# EAGLE board 13791-Qwiic Shield for RaspberryPi-panel.v10 (EAGLE 7.5.0), part 1 of 2
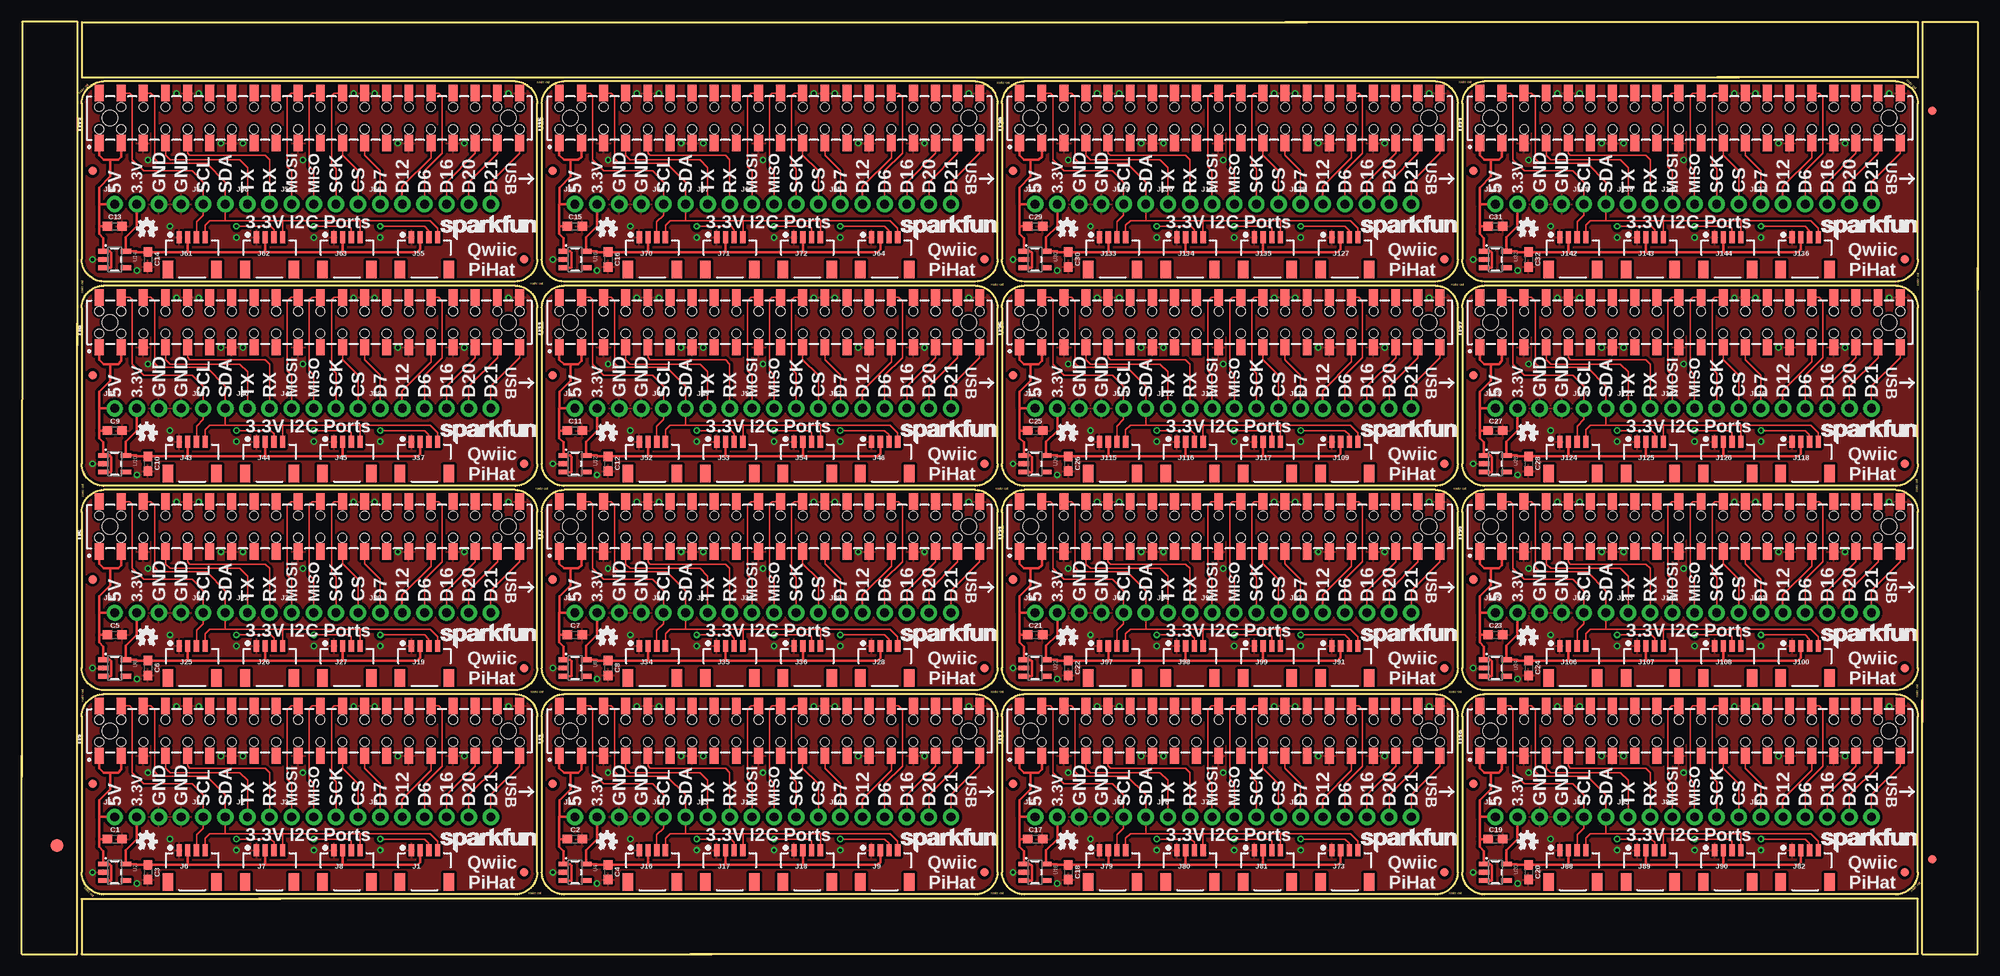
[diagram p0: board, top side]
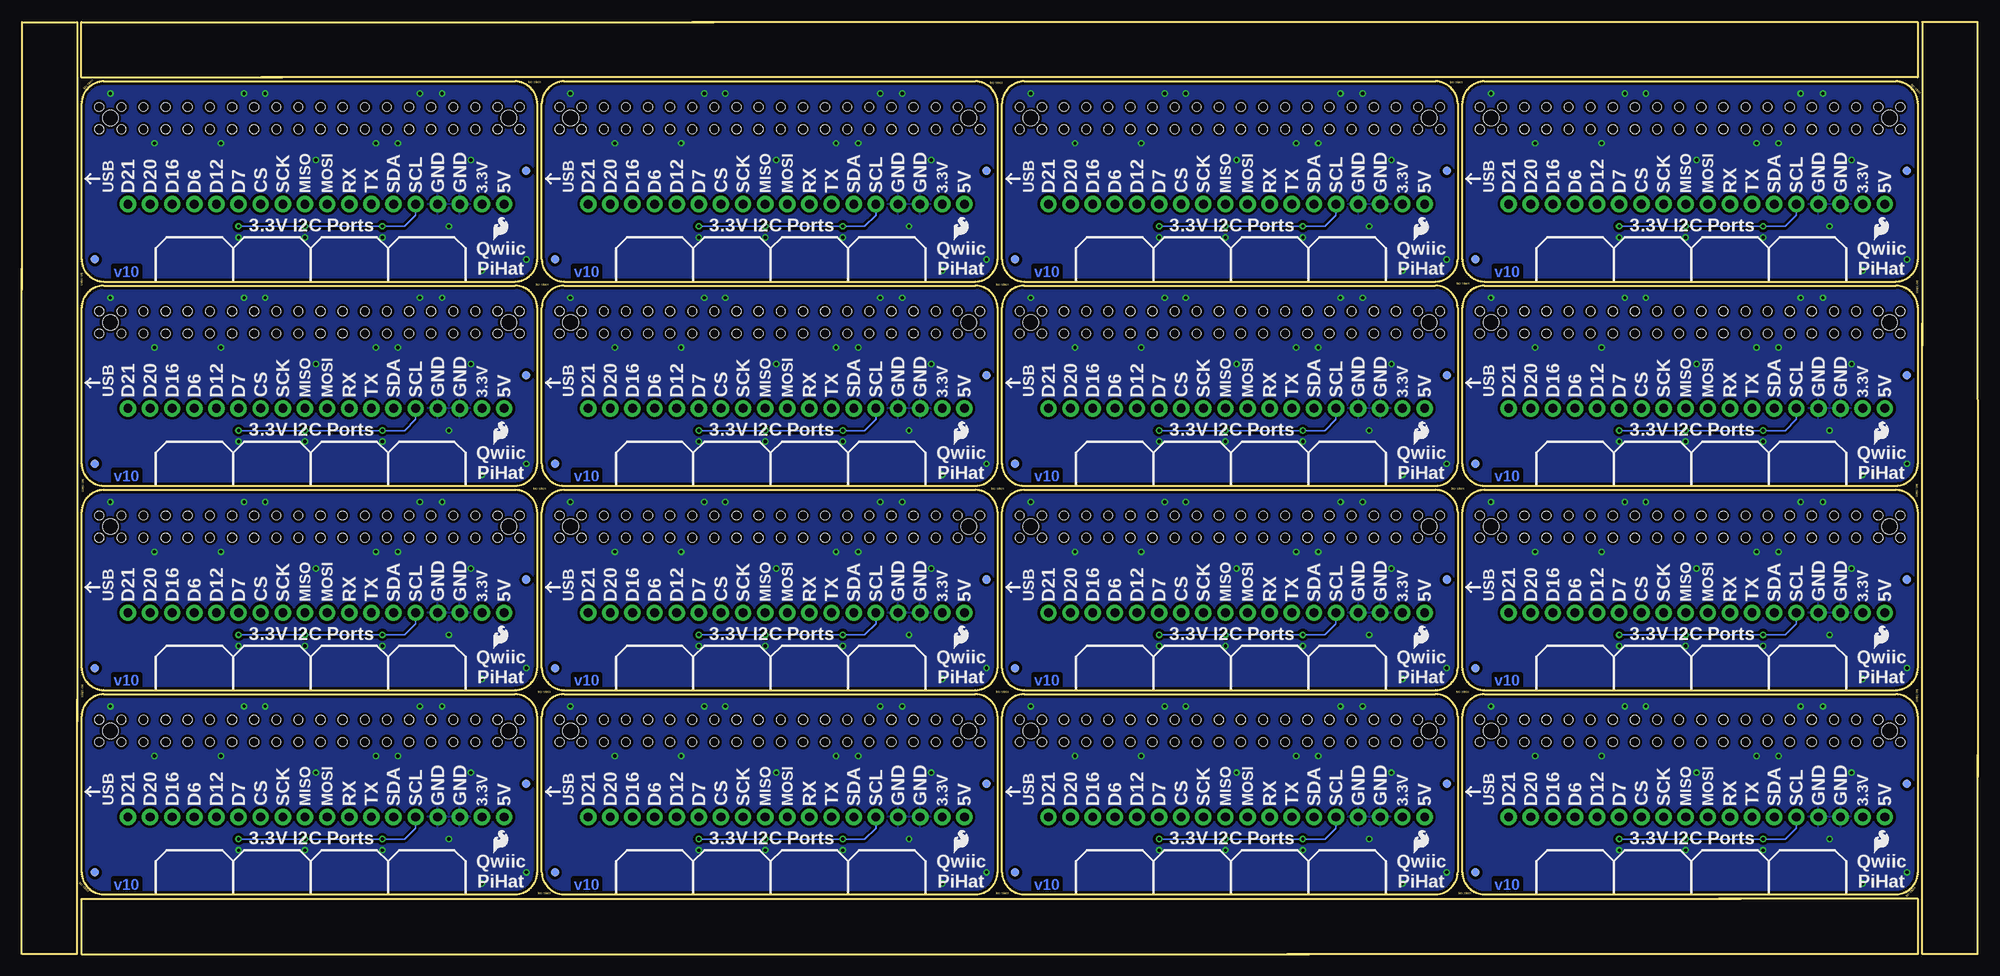
[diagram p1: board, bottom side, seen from below]

Size 224.54 x 107.01 mm. Coordinates in mm from the lower left corner, seen from the top.
Outline: 79.25,0 6.86,0 6.86,6.35 29.72,6.35
Outline: 27.18,6.35 217.68,6.35 217.68,0 76.71,0
Outline: 6.35,72.39 6.35,0 0,0 0,22.86
Outline: 0,20.32 0.03,107.01 6.38,107.01 6.35,69.85
Outline: 145.06,106.98 217.7,106.98 217.7,100.64 194.59,100.64
Outline: 197.13,100.64 6.88,100.64 6.88,106.98 147.6,106.98
Outline: 218.19,26.67 218.19,106.98 224.54,106.98 224.54,76.2
Outline: 224.54,78.74 224.54,0 218.19,0 218.19,29.21
Outline: 6.86,27.3 6.86,9.4 arc87 9.4,6.86 56.64,6.86 arc87 59.18,9.4 59.18,27.3 arc87 56.64,29.84 9.4,29.84 arc87 6.86,27.3
Outline: 59.69,27.3 59.69,9.4 arc87 62.23,6.86 109.47,6.86 arc87 112.01,9.4 112.01,27.3 arc87 109.47,29.84 62.23,29.84 arc87 59.69,27.3
Outline: 6.86,50.75 6.86,32.84 arc87 9.4,30.3 56.64,30.3 arc87 59.18,32.84 59.18,50.75 arc87 56.64,53.29 9.4,53.29 arc87 6.86,50.75
Outline: 59.69,50.75 59.69,32.84 arc87 62.23,30.3 109.47,30.3 arc87 112.01,32.84 112.01,50.75 arc87 109.47,53.29 62.23,53.29 arc87 59.69,50.75
Outline: 6.86,74.19 6.86,56.29 arc87 9.4,53.75 56.64,53.75 arc87 59.18,56.29 59.18,74.19 arc87 56.64,76.73 9.4,76.73 arc87 6.86,74.19
Outline: 59.69,74.19 59.69,56.29 arc87 62.23,53.75 109.47,53.75 arc87 112.01,56.29 112.01,74.19 arc87 109.47,76.73 62.23,76.73 arc87 59.69,74.19
Outline: 6.86,97.64 6.86,79.73 arc87 9.4,77.19 56.64,77.19 arc87 59.18,79.73 59.18,97.64 arc87 56.64,100.18 9.4,100.18 arc87 6.86,97.64
Outline: 59.69,97.64 59.69,79.73 arc87 62.23,77.19 109.47,77.19 arc87 112.01,79.73 112.01,97.64 arc87 109.47,100.18 62.23,100.18 arc87 59.69,97.64
Outline: 112.52,27.3 112.52,9.4 arc87 115.06,6.86 162.31,6.86 arc87 164.85,9.4 164.85,27.3 arc87 162.31,29.84 115.06,29.84 arc87 112.52,27.3
Outline: 165.35,27.3 165.35,9.4 arc87 167.89,6.86 215.14,6.86 arc87 217.68,9.4 217.68,27.3 arc87 215.14,29.84 167.89,29.84 arc87 165.35,27.3
Outline: 112.52,50.75 112.52,32.84 arc87 115.06,30.3 162.31,30.3 arc87 164.85,32.84 164.85,50.75 arc87 162.31,53.29 115.06,53.29 arc87 112.52,50.75
Outline: 165.35,50.75 165.35,32.84 arc87 167.89,30.3 215.14,30.3 arc87 217.68,32.84 217.68,50.75 arc87 215.14,53.29 167.89,53.29 arc87 165.35,50.75
Outline: 112.52,74.19 112.52,56.29 arc87 115.06,53.75 162.31,53.75 arc87 164.85,56.29 164.85,74.19 arc87 162.31,76.73 115.06,76.73 arc87 112.52,74.19
Outline: 165.35,74.19 165.35,56.29 arc87 167.89,53.75 215.14,53.75 arc87 217.68,56.29 217.68,74.19 arc87 215.14,76.73 167.89,76.73 arc87 165.35,74.19
Outline: 112.52,97.64 112.52,79.73 arc87 115.06,77.19 162.31,77.19 arc87 164.85,79.73 164.85,97.64 arc87 162.31,100.18 115.06,100.18 arc87 112.52,97.64
Outline: 165.35,97.64 165.35,79.73 arc87 167.89,77.19 215.14,77.19 arc87 217.68,79.73 217.68,97.64 arc87 215.14,100.18 167.89,100.18 arc87 165.35,97.64
Copper layers (1*16): Top 0.035mm / dielectric 1.5mm / Bottom 0.035mm
Design rules "SparkFun-2-layer-TIGHT *": minimum track width 7mil, minimum drill 15mil, track to track 6mil, track to pad 6mil, pad to pad 6mil, via to via 6mil, smd to smd 6mil, copper to edge 7mil, drill to drill 7mil, minimum pad ring 7mil, minimum via ring 7mil, stop-mask expansion 4mil, vias tented up to drill 25mil, thermal gap 10mil
Net classes: 0 Default: width 0.178 mm; 1 vcc: width 0.178 mm

## Footprints (pad centres in the part's own frame; a part is rotated, then mirrored left to right if it is on the bottom)
0603 = smd 1.1 x 1: 1 -0.85,0; 2 0.85,0
FIDUCIAL-1.5X3 = smd 1.5 x 1.5: 1 0,0
FIDUCIAL-1X2 = smd 1 x 1: 1 0,0
1X04_1MM_RA = smd 0.6 x 1.35: 1 -1.5,0; 2 -0.5,0; 3 0.5,0; 4 1.5,0 | smd 1.2 x 2: NC1 2.8,-3.675; NC2 -2.8,-3.675
1X02_NO_SILK = drill 1.016 pad 1.88: 1 0,0; 2 2.54,0
1X04_NO_SILK = drill 1.016 pad 1.88: 1 0,0; 2 2.54,0; 3 5.08,0; 4 7.62,0
1X06_NO_SILK = drill 1.016 pad 1.88: 1 0,0; 2 2.54,0; 3 5.08,0; 4 7.62,0; 5 10.16,0; 6 12.7,0
RASPBERRY_PI_SHIELD_BOTTOM_ENTRY_NOHOLES = smd 1.02 x 1.87: 1 8.37,7.665; 2 8.37,1.935; 3 10.91,7.665; 4 10.91,1.935; 5 13.45,7.665; 6 13.45,1.935; 7 15.99,7.665; 8 15.99,1.935; 9 18.53,7.665; 10 18.53,1.935; 11 21.07,7.665; 12 21.07,1.935; 13 23.61,7.665; 14 23.61,1.935; 15 26.15,7.665; 16 26.15,1.935; 17 28.69,7.665; 18 28.69,1.935; 19 31.23,7.665; 20 31.23,1.935; 21 33.77,7.665; 22 33.77,1.935; 23 36.31,7.665; 24 36.31,1.935; 25 38.85,7.665; 26 38.85,1.935; 27 41.39,7.665; 28 41.39,1.935; 29 43.93,7.665; 30 43.93,1.935; 31 46.47,7.665; 32 46.47,1.935; 33 49.01,7.665; 34 49.01,1.935; 35 51.55,7.665; 36 51.55,1.935; 37 54.09,7.665; 38 54.09,1.935; 39 56.63,7.665; 40 56.63,1.935 | hole 1.02: 31.23,6.07; 31.23,3.53; 28.69,3.53; 28.69,6.07; 26.15,6.07; 26.15,3.53; 23.61,3.53; 23.61,6.07; 36.31,6.07; 36.31,3.53; 33.77,3.53; 33.77,6.07; 15.99,6.07; 15.99,3.53; 13.45,3.53; 13.45,6.07; 10.91,6.07; 10.91,3.53; 8.37,3.53; 8.37,6.07; 21.07,6.07; 21.07,3.53; 18.53,3.53; 18.53,6.07; 46.47,6.07; 46.47,3.53; 43.93,3.53; 43.93,6.07; 41.39,6.07; 41.39,3.53; 38.85,3.53; 38.85,6.07; 51.55,6.07; 51.55,3.53; 49.01,3.53; 49.01,6.07; 54.09,6.07; 56.63,6.07; 56.63,3.53; 54.09,3.53 | hole 1.8: 55.36,4.8; 9.64,4.8
SOT23-5 = smd 0.55 x 1.2: 1 -0.95,-1.3; 2 0,-1.3; 3 0.95,-1.3; 4 0.95,1.3; 5 -0.95,1.3

## Placement (x,y rotation side)
C1  1.0uF  [0603]  10.67,13.21 0 top
C2  1.0uF  [0603]  63.5,13.21 0 top
C3  1.0uF  [0603]  14.48,9.4 270 top
C4  1.0uF  [0603]  67.31,9.4 270 top
C5  1.0uF  [0603]  10.67,36.65 0 top
C6  1.0uF  [0603]  14.48,32.84 270 top
C7  1.0uF  [0603]  63.5,36.65 0 top
C8  1.0uF  [0603]  67.31,32.84 270 top
C9  1.0uF  [0603]  10.67,60.1 0 top
C10  1.0uF  [0603]  14.48,56.29 270 top
C11  1.0uF  [0603]  63.5,60.1 0 top
C12  1.0uF  [0603]  67.31,56.29 270 top
C13  1.0uF  [0603]  10.67,83.54 0 top
C14  1.0uF  [0603]  14.48,79.73 270 top
C15  1.0uF  [0603]  63.5,83.54 0 top
C16  1.0uF  [0603]  67.31,79.73 270 top
C17  1.0uF  [0603]  116.33,13.21 0 top
C18  1.0uF  [0603]  120.14,9.4 270 top
C19  1.0uF  [0603]  169.16,13.21 0 top
C20  1.0uF  [0603]  172.97,9.4 270 top
C21  1.0uF  [0603]  116.33,36.65 0 top
C22  1.0uF  [0603]  120.14,32.84 270 top
C23  1.0uF  [0603]  169.16,36.65 0 top
C24  1.0uF  [0603]  172.97,32.84 270 top
C25  1.0uF  [0603]  116.33,60.1 0 top
C26  1.0uF  [0603]  120.14,56.29 270 top
C27  1.0uF  [0603]  169.16,60.1 0 top
C28  1.0uF  [0603]  172.97,56.29 270 top
C29  1.0uF  [0603]  116.33,83.54 0 top
C30  1.0uF  [0603]  120.14,79.73 270 top
C31  1.0uF  [0603]  169.16,83.54 0 top
C32  1.0uF  [0603]  172.97,79.73 270 top
E$1  [FIDUCIAL-1.5X3]  4.06,12.45 0 top
E$7  [FIDUCIAL-1X2]  219.33,96.77 180 top
E$8  [FIDUCIAL-1X2]  219.33,10.92 0 top
FD1  FIDUCIAL1X2  [FIDUCIAL-1X2]  8.13,19.56 180 top
FD2  FIDUCIAL1X2  [FIDUCIAL-1X2]  57.66,9.4 180 top
FD3  FIDUCIAL1X2  [FIDUCIAL-1X2]  57.66,9.4 0 bottom
FD4  FIDUCIAL1X2  [FIDUCIAL-1X2]  8.13,19.56 0 bottom
FD5  FIDUCIAL1X2  [FIDUCIAL-1X2]  60.96,19.56 180 top
FD6  FIDUCIAL1X2  [FIDUCIAL-1X2]  110.49,9.4 180 top
FD7  FIDUCIAL1X2  [FIDUCIAL-1X2]  110.49,9.4 0 bottom
FD8  FIDUCIAL1X2  [FIDUCIAL-1X2]  60.96,19.56 0 bottom
FD9  FIDUCIAL1X2  [FIDUCIAL-1X2]  8.13,43 180 top
FD10  FIDUCIAL1X2  [FIDUCIAL-1X2]  57.66,32.84 180 top
FD11  FIDUCIAL1X2  [FIDUCIAL-1X2]  57.66,32.84 0 bottom
FD12  FIDUCIAL1X2  [FIDUCIAL-1X2]  8.13,43 0 bottom
FD13  FIDUCIAL1X2  [FIDUCIAL-1X2]  60.96,43 180 top
FD14  FIDUCIAL1X2  [FIDUCIAL-1X2]  110.49,32.84 180 top
FD15  FIDUCIAL1X2  [FIDUCIAL-1X2]  110.49,32.84 0 bottom
FD16  FIDUCIAL1X2  [FIDUCIAL-1X2]  60.96,43 0 bottom
FD17  FIDUCIAL1X2  [FIDUCIAL-1X2]  8.13,66.45 180 top
FD18  FIDUCIAL1X2  [FIDUCIAL-1X2]  57.66,56.29 180 top
FD19  FIDUCIAL1X2  [FIDUCIAL-1X2]  57.66,56.29 0 bottom
FD20  FIDUCIAL1X2  [FIDUCIAL-1X2]  8.13,66.45 0 bottom
FD21  FIDUCIAL1X2  [FIDUCIAL-1X2]  60.96,66.45 180 top
FD22  FIDUCIAL1X2  [FIDUCIAL-1X2]  110.49,56.29 180 top
FD23  FIDUCIAL1X2  [FIDUCIAL-1X2]  110.49,56.29 0 bottom
FD24  FIDUCIAL1X2  [FIDUCIAL-1X2]  60.96,66.45 0 bottom
FD25  FIDUCIAL1X2  [FIDUCIAL-1X2]  8.13,89.89 180 top
FD26  FIDUCIAL1X2  [FIDUCIAL-1X2]  57.66,79.73 180 top
FD27  FIDUCIAL1X2  [FIDUCIAL-1X2]  57.66,79.73 0 bottom
FD28  FIDUCIAL1X2  [FIDUCIAL-1X2]  8.13,89.89 0 bottom
FD29  FIDUCIAL1X2  [FIDUCIAL-1X2]  60.96,89.89 180 top
FD30  FIDUCIAL1X2  [FIDUCIAL-1X2]  110.49,79.73 180 top
FD31  FIDUCIAL1X2  [FIDUCIAL-1X2]  110.49,79.73 0 bottom
FD32  FIDUCIAL1X2  [FIDUCIAL-1X2]  60.96,89.89 0 bottom
FD33  FIDUCIAL1X2  [FIDUCIAL-1X2]  113.79,19.56 180 top
FD34  FIDUCIAL1X2  [FIDUCIAL-1X2]  163.32,9.4 180 top
FD35  FIDUCIAL1X2  [FIDUCIAL-1X2]  163.32,9.4 0 bottom
FD36  FIDUCIAL1X2  [FIDUCIAL-1X2]  113.79,19.56 0 bottom
FD37  FIDUCIAL1X2  [FIDUCIAL-1X2]  166.62,19.56 180 top
FD38  FIDUCIAL1X2  [FIDUCIAL-1X2]  216.15,9.4 180 top
FD39  FIDUCIAL1X2  [FIDUCIAL-1X2]  216.15,9.4 0 bottom
FD40  FIDUCIAL1X2  [FIDUCIAL-1X2]  166.62,19.56 0 bottom
FD41  FIDUCIAL1X2  [FIDUCIAL-1X2]  113.79,43 180 top
FD42  FIDUCIAL1X2  [FIDUCIAL-1X2]  163.32,32.84 180 top
FD43  FIDUCIAL1X2  [FIDUCIAL-1X2]  163.32,32.84 0 bottom
FD44  FIDUCIAL1X2  [FIDUCIAL-1X2]  113.79,43 0 bottom
FD45  FIDUCIAL1X2  [FIDUCIAL-1X2]  166.62,43 180 top
FD46  FIDUCIAL1X2  [FIDUCIAL-1X2]  216.15,32.84 180 top
FD47  FIDUCIAL1X2  [FIDUCIAL-1X2]  216.15,32.84 0 bottom
FD48  FIDUCIAL1X2  [FIDUCIAL-1X2]  166.62,43 0 bottom
FD49  FIDUCIAL1X2  [FIDUCIAL-1X2]  113.79,66.45 180 top
FD50  FIDUCIAL1X2  [FIDUCIAL-1X2]  163.32,56.29 180 top
FD51  FIDUCIAL1X2  [FIDUCIAL-1X2]  163.32,56.29 0 bottom
FD52  FIDUCIAL1X2  [FIDUCIAL-1X2]  113.79,66.45 0 bottom
FD53  FIDUCIAL1X2  [FIDUCIAL-1X2]  166.62,66.45 180 top
FD54  FIDUCIAL1X2  [FIDUCIAL-1X2]  216.15,56.29 180 top
FD55  FIDUCIAL1X2  [FIDUCIAL-1X2]  216.15,56.29 0 bottom
FD56  FIDUCIAL1X2  [FIDUCIAL-1X2]  166.62,66.45 0 bottom
FD57  FIDUCIAL1X2  [FIDUCIAL-1X2]  113.79,89.89 180 top
FD58  FIDUCIAL1X2  [FIDUCIAL-1X2]  163.32,79.73 180 top
FD59  FIDUCIAL1X2  [FIDUCIAL-1X2]  163.32,79.73 0 bottom
FD60  FIDUCIAL1X2  [FIDUCIAL-1X2]  113.79,89.89 0 bottom
FD61  FIDUCIAL1X2  [FIDUCIAL-1X2]  166.62,89.89 180 top
FD62  FIDUCIAL1X2  [FIDUCIAL-1X2]  216.15,79.73 180 top
FD63  FIDUCIAL1X2  [FIDUCIAL-1X2]  216.15,79.73 0 bottom
FD64  FIDUCIAL1X2  [FIDUCIAL-1X2]  166.62,89.89 0 bottom
J1  Qwiic Right Angle  [1X04_1MM_RA]  46.23,11.94 0 top
J2  [1X02_NO_SILK]  25.91,15.75 0 top
J3  [1X04_NO_SILK]  30.99,15.75 0 top
J4  [1X06_NO_SILK]  41.15,15.75 0 top
J5  [1X04_NO_SILK]  10.67,15.75 0 top
J6  Qwiic Right Angle  [1X04_1MM_RA]  19.56,11.94 0 top
J7  Qwiic Right Angle  [1X04_1MM_RA]  28.45,11.94 0 top
J8  Qwiic Right Angle  [1X04_1MM_RA]  37.34,11.94 0 top
J9  Qwiic Right Angle  [1X04_1MM_RA]  99.06,11.94 0 top
J10  [1X06_NO_SILK]  93.98,15.75 0 top
J11  [1X02_NO_SILK]  73.66,15.75 0 top
J12  [1X02_NO_SILK]  20.83,15.75 0 top
J13  [1X02_NO_SILK]  78.74,15.75 0 top
J14  [1X04_NO_SILK]  83.82,15.75 0 top
J15  [1X04_NO_SILK]  63.5,15.75 0 top
J16  Qwiic Right Angle  [1X04_1MM_RA]  72.39,11.94 0 top
J17  Qwiic Right Angle  [1X04_1MM_RA]  81.28,11.94 0 top
J18  Qwiic Right Angle  [1X04_1MM_RA]  90.17,11.94 0 top
J19  Qwiic Right Angle  [1X04_1MM_RA]  46.23,35.38 0 top
J20  [1X06_NO_SILK]  41.15,39.19 0 top
J21  [1X02_NO_SILK]  20.83,39.19 0 top
J22  [1X02_NO_SILK]  25.91,39.19 0 top
J23  [1X04_NO_SILK]  30.99,39.19 0 top
J24  [1X04_NO_SILK]  10.67,39.19 0 top
J25  Qwiic Right Angle  [1X04_1MM_RA]  19.56,35.38 0 top
J26  Qwiic Right Angle  [1X04_1MM_RA]  28.45,35.38 0 top
J27  Qwiic Right Angle  [1X04_1MM_RA]  37.34,35.38 0 top
J28  Qwiic Right Angle  [1X04_1MM_RA]  99.06,35.38 0 top
J29  [1X06_NO_SILK]  93.98,39.19 0 top
J30  [1X02_NO_SILK]  73.66,39.19 0 top
J31  [1X02_NO_SILK]  78.74,39.19 0 top
J32  [1X04_NO_SILK]  83.82,39.19 0 top
J33  [1X04_NO_SILK]  63.5,39.19 0 top
J34  Qwiic Right Angle  [1X04_1MM_RA]  72.39,35.38 0 top
J35  Qwiic Right Angle  [1X04_1MM_RA]  81.28,35.38 0 top
J36  Qwiic Right Angle  [1X04_1MM_RA]  90.17,35.38 0 top
J37  Qwiic Right Angle  [1X04_1MM_RA]  46.23,58.83 0 top
J38  [1X06_NO_SILK]  41.15,62.64 0 top
J39  [1X02_NO_SILK]  20.83,62.64 0 top
J40  [1X02_NO_SILK]  25.91,62.64 0 top
J41  [1X04_NO_SILK]  30.99,62.64 0 top
J42  [1X04_NO_SILK]  10.67,62.64 0 top
J43  Qwiic Right Angle  [1X04_1MM_RA]  19.56,58.83 0 top
J44  Qwiic Right Angle  [1X04_1MM_RA]  28.45,58.83 0 top
J45  Qwiic Right Angle  [1X04_1MM_RA]  37.34,58.83 0 top
J46  Qwiic Right Angle  [1X04_1MM_RA]  99.06,58.83 0 top
J47  [1X06_NO_SILK]  93.98,62.64 0 top
J48  [1X02_NO_SILK]  73.66,62.64 0 top
J49  [1X02_NO_SILK]  78.74,62.64 0 top
J50  [1X04_NO_SILK]  83.82,62.64 0 top
J51  [1X04_NO_SILK]  63.5,62.64 0 top
J52  Qwiic Right Angle  [1X04_1MM_RA]  72.39,58.83 0 top
J53  Qwiic Right Angle  [1X04_1MM_RA]  81.28,58.83 0 top
J54  Qwiic Right Angle  [1X04_1MM_RA]  90.17,58.83 0 top
J55  Qwiic Right Angle  [1X04_1MM_RA]  46.23,82.27 0 top
J56  [1X06_NO_SILK]  41.15,86.08 0 top
J57  [1X02_NO_SILK]  20.83,86.08 0 top
J58  [1X02_NO_SILK]  25.91,86.08 0 top
J59  [1X04_NO_SILK]  30.99,86.08 0 top
J60  [1X04_NO_SILK]  10.67,86.08 0 top
J61  Qwiic Right Angle  [1X04_1MM_RA]  19.56,82.27 0 top
J62  Qwiic Right Angle  [1X04_1MM_RA]  28.45,82.27 0 top
J63  Qwiic Right Angle  [1X04_1MM_RA]  37.34,82.27 0 top
J64  Qwiic Right Angle  [1X04_1MM_RA]  99.06,82.27 0 top
J65  [1X06_NO_SILK]  93.98,86.08 0 top
J66  [1X02_NO_SILK]  73.66,86.08 0 top
J67  [1X02_NO_SILK]  78.74,86.08 0 top
J68  [1X04_NO_SILK]  83.82,86.08 0 top
J69  [1X04_NO_SILK]  63.5,86.08 0 top
J70  Qwiic Right Angle  [1X04_1MM_RA]  72.39,82.27 0 top
J71  Qwiic Right Angle  [1X04_1MM_RA]  81.28,82.27 0 top
J72  Qwiic Right Angle  [1X04_1MM_RA]  90.17,82.27 0 top
J73  Qwiic Right Angle  [1X04_1MM_RA]  151.89,11.94 0 top
J74  [1X06_NO_SILK]  146.81,15.75 0 top
J75  [1X02_NO_SILK]  126.49,15.75 0 top
J76  [1X02_NO_SILK]  131.57,15.75 0 top
J77  [1X04_NO_SILK]  136.65,15.75 0 top
J78  [1X04_NO_SILK]  116.33,15.75 0 top
J79  Qwiic Right Angle  [1X04_1MM_RA]  125.22,11.94 0 top
J80  Qwiic Right Angle  [1X04_1MM_RA]  134.11,11.94 0 top
J81  Qwiic Right Angle  [1X04_1MM_RA]  143,11.94 0 top
J82  Qwiic Right Angle  [1X04_1MM_RA]  204.72,11.94 0 top
J83  [1X06_NO_SILK]  199.64,15.75 0 top
J84  [1X02_NO_SILK]  179.32,15.75 0 top
J85  [1X02_NO_SILK]  184.4,15.75 0 top
J86  [1X04_NO_SILK]  189.48,15.75 0 top
J87  [1X04_NO_SILK]  169.16,15.75 0 top
J88  Qwiic Right Angle  [1X04_1MM_RA]  178.05,11.94 0 top
J89  Qwiic Right Angle  [1X04_1MM_RA]  186.94,11.94 0 top
J90  Qwiic Right Angle  [1X04_1MM_RA]  195.83,11.94 0 top
J91  Qwiic Right Angle  [1X04_1MM_RA]  151.89,35.38 0 top
J92  [1X06_NO_SILK]  146.81,39.19 0 top
J93  [1X02_NO_SILK]  126.49,39.19 0 top
J94  [1X02_NO_SILK]  131.57,39.19 0 top
J95  [1X04_NO_SILK]  136.65,39.19 0 top
J96  [1X04_NO_SILK]  116.33,39.19 0 top
J97  Qwiic Right Angle  [1X04_1MM_RA]  125.22,35.38 0 top
J98  Qwiic Right Angle  [1X04_1MM_RA]  134.11,35.38 0 top
J99  Qwiic Right Angle  [1X04_1MM_RA]  143,35.38 0 top
J100  Qwiic Right Angle  [1X04_1MM_RA]  204.72,35.38 0 top
J101  [1X06_NO_SILK]  199.64,39.19 0 top
J102  [1X02_NO_SILK]  179.32,39.19 0 top
J103  [1X02_NO_SILK]  184.4,39.19 0 top
J104  [1X04_NO_SILK]  189.48,39.19 0 top
J105  [1X04_NO_SILK]  169.16,39.19 0 top
J106  Qwiic Right Angle  [1X04_1MM_RA]  178.05,35.38 0 top
J107  Qwiic Right Angle  [1X04_1MM_RA]  186.94,35.38 0 top
J108  Qwiic Right Angle  [1X04_1MM_RA]  195.83,35.38 0 top
J109  Qwiic Right Angle  [1X04_1MM_RA]  151.89,58.83 0 top
J110  [1X06_NO_SILK]  146.81,62.64 0 top
J111  [1X02_NO_SILK]  126.49,62.64 0 top
J112  [1X02_NO_SILK]  131.57,62.64 0 top
J113  [1X04_NO_SILK]  136.65,62.64 0 top
J114  [1X04_NO_SILK]  116.33,62.64 0 top
J115  Qwiic Right Angle  [1X04_1MM_RA]  125.22,58.83 0 top
J116  Qwiic Right Angle  [1X04_1MM_RA]  134.11,58.83 0 top
J117  Qwiic Right Angle  [1X04_1MM_RA]  143,58.83 0 top
J118  Qwiic Right Angle  [1X04_1MM_RA]  204.72,58.83 0 top
J119  [1X06_NO_SILK]  199.64,62.64 0 top
J120  [1X02_NO_SILK]  179.32,62.64 0 top
J121  [1X02_NO_SILK]  184.4,62.64 0 top
J122  [1X04_NO_SILK]  189.48,62.64 0 top
J123  [1X04_NO_SILK]  169.16,62.64 0 top
J124  Qwiic Right Angle  [1X04_1MM_RA]  178.05,58.83 0 top
J125  Qwiic Right Angle  [1X04_1MM_RA]  186.94,58.83 0 top
J126  Qwiic Right Angle  [1X04_1MM_RA]  195.83,58.83 0 top
J127  Qwiic Right Angle  [1X04_1MM_RA]  151.89,82.27 0 top
J128  [1X06_NO_SILK]  146.81,86.08 0 top
J129  [1X02_NO_SILK]  126.49,86.08 0 top
J130  [1X02_NO_SILK]  131.57,86.08 0 top
J131  [1X04_NO_SILK]  136.65,86.08 0 top
J132  [1X04_NO_SILK]  116.33,86.08 0 top
J133  Qwiic Right Angle  [1X04_1MM_RA]  125.22,82.27 0 top
J134  Qwiic Right Angle  [1X04_1MM_RA]  134.11,82.27 0 top
J135  Qwiic Right Angle  [1X04_1MM_RA]  143,82.27 0 top
J136  Qwiic Right Angle  [1X04_1MM_RA]  204.72,82.27 0 top
J137  [1X06_NO_SILK]  199.64,86.08 0 top
J138  [1X02_NO_SILK]  179.32,86.08 0 top
J139  [1X02_NO_SILK]  184.4,86.08 0 top
J140  [1X04_NO_SILK]  189.48,86.08 0 top
J141  [1X04_NO_SILK]  169.16,86.08 0 top
J142  Qwiic Right Angle  [1X04_1MM_RA]  178.05,82.27 0 top
J143  Qwiic Right Angle  [1X04_1MM_RA]  186.94,82.27 0 top
J144  Qwiic Right Angle  [1X04_1MM_RA]  195.83,82.27 0 top
LOGO1  OSHW-LOGOMINI  [OSHW-LOGO-MINI]  14.35,12.95 0 top
LOGO2  OSHW-LOGOMINI  [OSHW-LOGO-MINI]  67.18,12.95 0 top
LOGO3  OSHW-LOGOMINI  [OSHW-LOGO-MINI]  14.35,36.4 0 top
LOGO4  OSHW-LOGOMINI  [OSHW-LOGO-MINI]  67.18,36.4 0 top
LOGO5  OSHW-LOGOMINI  [OSHW-LOGO-MINI]  14.35,59.84 0 top
LOGO6  OSHW-LOGOMINI  [OSHW-LOGO-MINI]  67.18,59.84 0 top
LOGO7  OSHW-LOGOMINI  [OSHW-LOGO-MINI]  14.35,83.29 0 top
LOGO8  OSHW-LOGOMINI  [OSHW-LOGO-MINI]  67.18,83.29 0 top
LOGO9  OSHW-LOGOMINI  [OSHW-LOGO-MINI]  120.02,12.95 0 top
LOGO10  OSHW-LOGOMINI  [OSHW-LOGO-MINI]  172.85,12.95 0 top
LOGO11  OSHW-LOGOMINI  [OSHW-LOGO-MINI]  120.02,36.4 0 top
LOGO12  OSHW-LOGOMINI  [OSHW-LOGO-MINI]  172.85,36.4 0 top
LOGO13  OSHW-LOGOMINI  [OSHW-LOGO-MINI]  120.02,59.84 0 top
LOGO14  OSHW-LOGOMINI  [OSHW-LOGO-MINI]  172.85,59.84 0 top
LOGO15  OSHW-LOGOMINI  [OSHW-LOGO-MINI]  120.02,83.29 0 top
LOGO16  OSHW-LOGOMINI  [OSHW-LOGO-MINI]  172.85,83.29 0 top
U1  [RASPBERRY_PI_SHIELD_BOTTOM_ENTRY_NOHOLES]  53.34,20.83 0 top
U2  3.3V/600mA  [SOT23-5]  10.67,9.4 270 top
U3  [RASPBERRY_PI_SHIELD_BOTTOM_ENTRY_NOHOLES]  0.51,20.83 0 top
U4  3.3V/600mA  [SOT23-5]  63.5,9.4 270 top
U5  [RASPBERRY_PI_SHIELD_BOTTOM_ENTRY_NOHOLES]  0.51,44.27 0 top
U6  3.3V/600mA  [SOT23-5]  10.67,32.84 270 top
U7  [RASPBERRY_PI_SHIELD_BOTTOM_ENTRY_NOHOLES]  53.34,44.27 0 top
U8  3.3V/600mA  [SOT23-5]  63.5,32.84 270 top
U9  [RASPBERRY_PI_SHIELD_BOTTOM_ENTRY_NOHOLES]  0.51,67.72 0 top
U10  3.3V/600mA  [SOT23-5]  10.67,56.29 270 top
U11  [RASPBERRY_PI_SHIELD_BOTTOM_ENTRY_NOHOLES]  53.34,67.72 0 top
U12  3.3V/600mA  [SOT23-5]  63.5,56.29 270 top
U13  [RASPBERRY_PI_SHIELD_BOTTOM_ENTRY_NOHOLES]  0.51,91.16 0 top
U14  3.3V/600mA  [SOT23-5]  10.67,79.73 270 top
U15  [RASPBERRY_PI_SHIELD_BOTTOM_ENTRY_NOHOLES]  53.34,91.16 0 top
U16  3.3V/600mA  [SOT23-5]  63.5,79.73 270 top
U17  [RASPBERRY_PI_SHIELD_BOTTOM_ENTRY_NOHOLES]  106.17,20.83 0 top
U18  3.3V/600mA  [SOT23-5]  116.33,9.4 270 top
U19  [RASPBERRY_PI_SHIELD_BOTTOM_ENTRY_NOHOLES]  159,20.83 0 top
U20  3.3V/600mA  [SOT23-5]  169.16,9.4 270 top
U21  [RASPBERRY_PI_SHIELD_BOTTOM_ENTRY_NOHOLES]  106.17,44.27 0 top
U22  3.3V/600mA  [SOT23-5]  116.33,32.84 270 top
U23  [RASPBERRY_PI_SHIELD_BOTTOM_ENTRY_NOHOLES]  159,44.27 0 top
U24  3.3V/600mA  [SOT23-5]  169.16,32.84 270 top
U25  [RASPBERRY_PI_SHIELD_BOTTOM_ENTRY_NOHOLES]  106.17,67.72 0 top
U26  3.3V/600mA  [SOT23-5]  116.33,56.29 270 top
U27  [RASPBERRY_PI_SHIELD_BOTTOM_ENTRY_NOHOLES]  159,67.72 0 top
U28  3.3V/600mA  [SOT23-5]  169.16,56.29 270 top
U29  [RASPBERRY_PI_SHIELD_BOTTOM_ENTRY_NOHOLES]  106.17,91.16 0 top
U30  3.3V/600mA  [SOT23-5]  116.33,79.73 270 top
U31  [RASPBERRY_PI_SHIELD_BOTTOM_ENTRY_NOHOLES]  159,91.16 0 top
U32  3.3V/600mA  [SOT23-5]  169.16,79.73 270 top
U$1  SFE_LOGO_FLAME.1_INCH  [SFE_LOGO_FLAME_.1]  12.19,11.3 0 bottom
U$2  SFE_LOGO_NAME.1_INCH  [SFE_LOGO_NAME_.1]  47.62,11.18 0 top
U$3  SFE_LOGO_FLAME.1_INCH  [SFE_LOGO_FLAME_.1]  65.02,11.3 0 bottom
U$4  SFE_LOGO_NAME.1_INCH  [SFE_LOGO_NAME_.1]  100.46,11.18 0 top
U$5  SFE_LOGO_FLAME.1_INCH  [SFE_LOGO_FLAME_.1]  12.19,34.75 0 bottom
U$6  SFE_LOGO_NAME.1_INCH  [SFE_LOGO_NAME_.1]  47.62,34.62 0 top
U$7  SFE_LOGO_FLAME.1_INCH  [SFE_LOGO_FLAME_.1]  65.02,34.75 0 bottom
U$8  SFE_LOGO_NAME.1_INCH  [SFE_LOGO_NAME_.1]  100.46,34.62 0 top
U$9  SFE_LOGO_FLAME.1_INCH  [SFE_LOGO_FLAME_.1]  12.19,58.19 0 bottom
U$10  SFE_LOGO_NAME.1_INCH  [SFE_LOGO_NAME_.1]  47.62,58.06 0 top
U$11  SFE_LOGO_FLAME.1_INCH  [SFE_LOGO_FLAME_.1]  65.02,58.19 0 bottom
U$12  SFE_LOGO_NAME.1_INCH  [SFE_LOGO_NAME_.1]  100.46,58.06 0 top
U$13  SFE_LOGO_FLAME.1_INCH  [SFE_LOGO_FLAME_.1]  12.19,81.64 0 bottom
U$14  SFE_LOGO_NAME.1_INCH  [SFE_LOGO_NAME_.1]  47.62,81.51 0 top
U$15  SFE_LOGO_FLAME.1_INCH  [SFE_LOGO_FLAME_.1]  65.02,81.64 0 bottom
U$16  SFE_LOGO_NAME.1_INCH  [SFE_LOGO_NAME_.1]  100.46,81.51 0 top
U$17  SFE_LOGO_FLAME.1_INCH  [SFE_LOGO_FLAME_.1]  117.86,11.3 0 bottom
U$18  SFE_LOGO_NAME.1_INCH  [SFE_LOGO_NAME_.1]  153.29,11.18 0 top
U$19  SFE_LOGO_FLAME.1_INCH  [SFE_LOGO_FLAME_.1]  170.69,11.3 0 bottom
U$20  SFE_LOGO_NAME.1_INCH  [SFE_LOGO_NAME_.1]  206.12,11.18 0 top
U$21  SFE_LOGO_FLAME.1_INCH  [SFE_LOGO_FLAME_.1]  117.86,34.75 0 bottom
U$22  SFE_LOGO_NAME.1_INCH  [SFE_LOGO_NAME_.1]  153.29,34.62 0 top
U$23  SFE_LOGO_FLAME.1_INCH  [SFE_LOGO_FLAME_.1]  170.69,34.75 0 bottom
U$24  SFE_LOGO_NAME.1_INCH  [SFE_LOGO_NAME_.1]  206.12,34.62 0 top
U$25  SFE_LOGO_FLAME.1_INCH  [SFE_LOGO_FLAME_.1]  117.86,58.19 0 bottom
U$26  SFE_LOGO_NAME.1_INCH  [SFE_LOGO_NAME_.1]  153.29,58.06 0 top
U$27  SFE_LOGO_FLAME.1_INCH  [SFE_LOGO_FLAME_.1]  170.69,58.19 0 bottom
U$28  SFE_LOGO_NAME.1_INCH  [SFE_LOGO_NAME_.1]  206.12,58.06 0 top
U$29  SFE_LOGO_FLAME.1_INCH  [SFE_LOGO_FLAME_.1]  117.86,81.64 0 bottom
U$30  SFE_LOGO_NAME.1_INCH  [SFE_LOGO_NAME_.1]  153.29,81.51 0 top
U$31  SFE_LOGO_FLAME.1_INCH  [SFE_LOGO_FLAME_.1]  170.69,81.64 0 bottom
U$32  SFE_LOGO_NAME.1_INCH  [SFE_LOGO_NAME_.1]  206.12,81.51 0 top

## Library data of the parts
C1-C32 = SparkFun-Capacitors; PROD_ID: CAP-00868
E$1 = SparkFun-Retired
E$7 E$8 FD1-FD64 LOGO1-LOGO16 U$1-U$32 = SparkFun-Aesthetics
J1 J6-J9 J16-J19 J25-J28 J34-J37 J43-J46 J52-J55 J61-J64 J70-J73 J79-J82 J88-J91 J97-J100 J106-J109 J115-J118 J124-J127 J133-J136 J142-J144 = SparkFun-Connectors; PROD_ID: CONN-13694
J2 J11-J13 J21 J22 J30 J31 J39 J40 J48 J49 J57 J58 J66 J67 J75 J76 J84 J85 J93 J94 J102 J103 J111 J112 J120 J121 J129 J130 J138 J139 = SparkFun-Connectors
J3 J5 J14 J15 J23 J24 J32 J33 J41 J42 J50 J51 J59 J60 J68 J69 J77 J78 J86 J87 J95 J96 J104 J105 J113 J114 J122 J123 J131 J132 J140 J141 = SparkFun-Connectors; PROD_ID: CONN-09696
J4 J10 J20 J29 J38 J47 J56 J65 J74 J83 J92 J101 J110 J119 J128 J137 = SparkFun-Connectors; PROD_ID: CONN-08437
U1 U3 U5 U7 U9 U11 U13 U15 U17 U19 U21 U23 U25 U27 U29 U31 = SparkFun-Connectors; PROD_ID: CONN-13790
U2 U4 U6 U8 U10 U12 U14 U16 U18 U20 U22 U24 U26 U28 U30 U32 = SparkFun-IC-Power; PROD_ID: VREG-12457

## Nets
3.3V: C3.1 J1.2 J5.2 J6.2 J7.2 J8.2 U2.5
3.3V1: C4.1 J9.2 J15.2 J16.2 J17.2 J18.2 U4.5
3.3V2: C6.1 J19.2 J24.2 J25.2 J26.2 J27.2 U6.5
3.3V3: C8.1 J28.2 J33.2 J34.2 J35.2 J36.2 U8.5
3.3V4: C10.1 J37.2 J42.2 J43.2 J44.2 J45.2 U10.5
3.3V5: C12.1 J46.2 J51.2 J52.2 J53.2 J54.2 U12.5
3.3V6: C14.1 J55.2 J60.2 J61.2 J62.2 J63.2 U14.5
3.3V7: C16.1 J64.2 J69.2 J70.2 J71.2 J72.2 U16.5
3.3V8: C18.1 J73.2 J78.2 J79.2 J80.2 J81.2 U18.5
3.3V9: C20.1 J82.2 J87.2 J88.2 J89.2 J90.2 U20.5
3.3V10: C22.1 J91.2 J96.2 J97.2 J98.2 J99.2 U22.5
3.3V11: C24.1 J100.2 J105.2 J106.2 J107.2 J108.2 U24.5
3.3V12: C26.1 J109.2 J114.2 J115.2 J116.2 J117.2 U26.5
3.3V13: C28.1 J118.2 J123.2 J124.2 J125.2 J126.2 U28.5
3.3V14: C30.1 J127.2 J132.2 J133.2 J134.2 J135.2 U30.5
3.3V15: C32.1 J136.2 J141.2 J142.2 J143.2 J144.2 U32.5
5V: C1.1 J5.1 U2.1 U2.3 U3.2 U3.4
5V1: C2.1 J15.1 U1.2 U1.4 U4.1 U4.3
5V2: C5.1 J24.1 U5.2 U5.4 U6.1 U6.3
5V3: C7.1 J33.1 U7.2 U7.4 U8.1 U8.3
5V4: C9.1 J42.1 U9.2 U9.4 U10.1 U10.3
5V5: C11.1 J51.1 U11.2 U11.4 U12.1 U12.3
5V6: C13.1 J60.1 U13.2 U13.4 U14.1 U14.3
5V7: C15.1 J69.1 U15.2 U15.4 U16.1 U16.3
5V8: C17.1 J78.1 U17.2 U17.4 U18.1 U18.3
5V9: C19.1 J87.1 U19.2 U19.4 U20.1 U20.3
5V10: C21.1 J96.1 U21.2 U21.4 U22.1 U22.3
5V11: C23.1 J105.1 U23.2 U23.4 U24.1 U24.3
5V12: C25.1 J114.1 U25.2 U25.4 U26.1 U26.3
5V13: C27.1 J123.1 U27.2 U27.4 U28.1 U28.3
5V14: C29.1 J132.1 U29.2 U29.4 U30.1 U30.3
5V15: C31.1 J141.1 U31.2 U31.4 U32.1 U32.3
CS: J3.4 U3.24
CS1: J14.4 U1.24
CS2: J23.4 U5.24
CS3: J32.4 U7.24
CS4: J41.4 U9.24
CS5: J50.4 U11.24
CS6: J59.4 U13.24
CS7: J68.4 U15.24
CS8: J77.4 U17.24
CS9: J86.4 U19.24
CS10: J95.4 U21.24
CS11: J104.4 U23.24
CS12: J113.4 U25.24
CS13: J122.4 U27.24
CS14: J131.4 U29.24
CS15: J140.4 U31.24
D1: U1.29
D2: J10.3 U1.31
D3: J10.1 U1.26
D4: U3.7
D5: U3.29
D6: J4.3 U3.31
D7: J4.1 U3.26
D8: J10.2 U1.32
D9: U1.33
D10: J10.4 U1.36
D11: U1.11
D12: J4.2 U3.32
D13: U3.33
D14: U1.12
D15: U1.35
D16: J4.4 U3.36
D17: U3.11
D18: U3.12
D19: U3.35
D20: J4.5 U3.38
D21: J4.6 U3.40
D22: U3.15
D23: U3.16
D24: U3.18
D25: U3.22
D26: U3.37
D27: U3.13
D28: J10.5 U1.38
D29: J10.6 U1.40
D30: U1.15
D31: U1.16
D32: U1.18
D33: U1.22
D34: U1.37
D35: U1.13
D36: U1.7
D37: U5.29
D38: J20.3 U5.31
D39: J20.1 U5.26
D40: J20.2 U5.32
D41: U5.33
D42: J20.4 U5.36
D43: U5.11
D44: U5.12
D45: U5.35
D46: J20.5 U5.38
D47: J20.6 U5.40
D48: U5.15
D49: U5.16
D50: U5.18
D51: U5.22
D52: U5.37
D53: U5.13
D54: U5.7
D55: U7.29
D56: J29.3 U7.31
D57: J29.1 U7.26
D58: J29.2 U7.32
D59: U7.33
D60: J29.4 U7.36
D61: U7.11
D62: U7.12
D63: U7.35
D64: J29.5 U7.38
D65: J29.6 U7.40
D66: U7.15
D67: U7.16
D68: U7.18
D69: U7.22
D70: U7.37
D71: U7.13
D72: U7.7
D73: U9.29
D74: J38.3 U9.31
D75: J38.1 U9.26
D76: J38.2 U9.32
D77: U9.33
D78: J38.4 U9.36
D79: U9.11
D80: U9.12
D81: U9.35
D82: J38.5 U9.38
D83: J38.6 U9.40
D84: U9.15
D85: U9.16
D86: U9.18
D87: U9.22
D88: U9.37
D89: U9.13
D90: U9.7
D91: U11.29
D92: J47.3 U11.31
D93: J47.1 U11.26
D94: J47.2 U11.32
D95: U11.33
D96: J47.4 U11.36
D97: U11.11
D98: U11.12
D99: U11.35
D100: J47.5 U11.38
D101: J47.6 U11.40
D102: U11.15
D103: U11.16
D104: U11.18
D105: U11.22
D106: U11.37
D107: U11.13
D108: U11.7
D109: U13.29
D110: J56.3 U13.31
D111: J56.1 U13.26
D112: J56.2 U13.32
D113: U13.33
D114: J56.4 U13.36
D115: U13.11
D116: U13.12
D117: U13.35
D118: J56.5 U13.38
D119: J56.6 U13.40
D120: U13.15
D121: U13.16
D122: U13.18
D123: U13.22
D124: U13.37
D125: U13.13
D126: U13.7
D127: U15.29
D128: J65.3 U15.31
D129: J65.1 U15.26
D130: J65.2 U15.32
D131: U15.33
D132: J65.4 U15.36
D133: U15.11
D134: U15.12
D135: U15.35
D136: J65.5 U15.38
D137: J65.6 U15.40
D138: U15.15
D139: U15.16
D140: U15.18
D141: U15.22
D142: U15.37
D143: U15.13
D144: U15.7
D145: U17.29
D146: J74.3 U17.31
D147: J74.1 U17.26
D148: J74.2 U17.32
D149: U17.33
D150: J74.4 U17.36
D151: U17.11
D152: U17.12
D153: U17.35
D154: J74.5 U17.38
D155: J74.6 U17.40
D156: U17.15
D157: U17.16
D158: U17.18
D159: U17.22
D160: U17.37
D161: U17.13
D162: U17.7
D163: U19.29
D164: J83.3 U19.31
D165: J83.1 U19.26
D166: J83.2 U19.32
D167: U19.33
D168: J83.4 U19.36
D169: U19.11
D170: U19.12
D171: U19.35
D172: J83.5 U19.38
D173: J83.6 U19.40
D174: U19.15
D175: U19.16
D176: U19.18
D177: U19.22
D178: U19.37
D179: U19.13
D180: U19.7
D181: U21.29
D182: J92.3 U21.31
D183: J92.1 U21.26
D184: J92.2 U21.32
D185: U21.33
D186: J92.4 U21.36
D187: U21.11
D188: U21.12
D189: U21.35
D190: J92.5 U21.38
D191: J92.6 U21.40
D192: U21.15
D193: U21.16
D194: U21.18
D195: U21.22
D196: U21.37
D197: U21.13
D198: U21.7
D199: U23.29
D200: J101.3 U23.31
D201: J101.1 U23.26
D202: J101.2 U23.32
D203: U23.33
D204: J101.4 U23.36
D205: U23.11
D206: U23.12
D207: U23.35
D208: J101.5 U23.38
D209: J101.6 U23.40
D210: U23.15
D211: U23.16
D212: U23.18
D213: U23.22
D214: U23.37
D215: U23.13
D216: U23.7
D217: U25.29
D218: J110.3 U25.31
D219: J110.1 U25.26
D220: J110.2 U25.32
D221: U25.33
D222: J110.4 U25.36
D223: U25.11
D224: U25.12
D225: U25.35
D226: J110.5 U25.38
D227: J110.6 U25.40
D228: U25.15
D229: U25.16
D230: U25.18
D231: U25.22
D232: U25.37
D233: U25.13
D234: U25.7
D235: U27.29
D236: J119.3 U27.31
D237: J119.1 U27.26
D238: J119.2 U27.32
D239: U27.33
D240: J119.4 U27.36
D241: U27.11
D242: U27.12
D243: U27.35
D244: J119.5 U27.38
D245: J119.6 U27.40
D246: U27.15
D247: U27.16
D248: U27.18
D249: U27.22
D250: U27.37
D251: U27.13
D252: U27.7
D253: U29.29
D254: J128.3 U29.31
D255: J128.1 U29.26
D256: J128.2 U29.32
D257: U29.33
D258: J128.4 U29.36
D259: U29.11
D260: U29.12
D261: U29.35
D262: J128.5 U29.38
D263: J128.6 U29.40
D264: U29.15
D265: U29.16
D266: U29.18
D267: U29.22
D268: U29.37
D269: U29.13
D270: U29.7
D271: U31.29
D272: J137.3 U31.31
D273: J137.1 U31.26
D274: J137.2 U31.32
D275: U31.33
D276: J137.4 U31.36
D277: U31.11
D278: U31.12
D279: U31.35
D280: J137.5 U31.38
D281: J137.6 U31.40
D282: U31.15
D283: U31.16
D284: U31.18
D285: U31.22
D286: U31.37
D287: U31.13
D288: U31.7
GND [vcc]: C1.2 C3.2 J1.1 J5.3 J5.4 J6.1 J7.1 J8.1 U2.2 U3.6 U3.9 U3.14 U3.20 U3.25 U3.30 U3.34 U3.39
GND1 [vcc]: C2.2 C4.2 J9.1 J15.3 J15.4 J16.1 J17.1 J18.1 U1.6 U1.9 U1.14 U1.20 U1.25 U1.30 U1.34 U1.39 U4.2
GND2 [vcc]: C5.2 C6.2 J19.1 J24.3 J24.4 J25.1 J26.1 J27.1 U5.6 U5.9 U5.14 U5.20 U5.25 U5.30 U5.34 U5.39 U6.2
GND3 [vcc]: C7.2 C8.2 J28.1 J33.3 J33.4 J34.1 J35.1 J36.1 U7.6 U7.9 U7.14 U7.20 U7.25 U7.30 U7.34 U7.39 U8.2
GND4 [vcc]: C9.2 C10.2 J37.1 J42.3 J42.4 J43.1 J44.1 J45.1 U9.6 U9.9 U9.14 U9.20 U9.25 U9.30 U9.34 U9.39 U10.2
GND5 [vcc]: C11.2 C12.2 J46.1 J51.3 J51.4 J52.1 J53.1 J54.1 U11.6 U11.9 U11.14 U11.20 U11.25 U11.30 U11.34 U11.39 U12.2
GND6 [vcc]: C13.2 C14.2 J55.1 J60.3 J60.4 J61.1 J62.1 J63.1 U13.6 U13.9 U13.14 U13.20 U13.25 U13.30 U13.34 U13.39 U14.2
GND7 [vcc]: C15.2 C16.2 J64.1 J69.3 J69.4 J70.1 J71.1 J72.1 U15.6 U15.9 U15.14 U15.20 U15.25 U15.30 U15.34 U15.39 U16.2
GND8 [vcc]: C17.2 C18.2 J73.1 J78.3 J78.4 J79.1 J80.1 J81.1 U17.6 U17.9 U17.14 U17.20 U17.25 U17.30 U17.34 U17.39 U18.2
GND9 [vcc]: C19.2 C20.2 J82.1 J87.3 J87.4 J88.1 J89.1 J90.1 U19.6 U19.9 U19.14 U19.20 U19.25 U19.30 U19.34 U19.39 U20.2
GND10 [vcc]: C21.2 C22.2 J91.1 J96.3 J96.4 J97.1 J98.1 J99.1 U21.6 U21.9 U21.14 U21.20 U21.25 U21.30 U21.34 U21.39 U22.2
GND11 [vcc]: C23.2 C24.2 J100.1 J105.3 J105.4 J106.1 J107.1 J108.1 U23.6 U23.9 U23.14 U23.20 U23.25 U23.30 U23.34 U23.39 U24.2
GND12 [vcc]: C25.2 C26.2 J109.1 J114.3 J114.4 J115.1 J116.1 J117.1 U25.6 U25.9 U25.14 U25.20 U25.25 U25.30 U25.34 U25.39 U26.2
GND13 [vcc]: C27.2 C28.2 J118.1 J123.3 J123.4 J124.1 J125.1 J126.1 U27.6 U27.9 U27.14 U27.20 U27.25 U27.30 U27.34 U27.39 U28.2
GND14 [vcc]: C29.2 C30.2 J127.1 J132.3 J132.4 J133.1 J134.1 J135.1 U29.6 U29.9 U29.14 U29.20 U29.25 U29.30 U29.34 U29.39 U30.2
GND15 [vcc]: C31.2 C32.2 J136.1 J141.3 J141.4 J142.1 J143.1 J144.1 U31.6 U31.9 U31.14 U31.20 U31.25 U31.30 U31.34 U31.39 U32.2
ID_SCL: U3.28
ID_SCL1: U1.28
ID_SCL2: U5.28
ID_SCL3: U7.28
ID_SCL4: U9.28
ID_SCL5: U11.28
ID_SCL6: U13.28
ID_SCL7: U15.28
ID_SCL8: U17.28
ID_SCL9: U19.28
ID_SCL10: U21.28
ID_SCL11: U23.28
ID_SCL12: U25.28
ID_SCL13: U27.28
ID_SCL14: U29.28
ID_SCL15: U31.28
ID_SDA: U3.27
ID_SDA1: U1.27
ID_SDA2: U5.27
ID_SDA3: U7.27
ID_SDA4: U9.27
ID_SDA5: U11.27
ID_SDA6: U13.27
ID_SDA7: U15.27
ID_SDA8: U17.27
ID_SDA9: U19.27
ID_SDA10: U21.27
ID_SDA11: U23.27
ID_SDA12: U25.27
ID_SDA13: U27.27
ID_SDA14: U29.27
ID_SDA15: U31.27
MISO: J3.2 U3.21
MISO1: J14.2 U1.21
MISO2: J23.2 U5.21
MISO3: J32.2 U7.21
MISO4: J41.2 U9.21
MISO5: J50.2 U11.21
MISO6: J59.2 U13.21
MISO7: J68.2 U15.21
MISO8: J77.2 U17.21
MISO9: J86.2 U19.21
MISO10: J95.2 U21.21
MISO11: J104.2 U23.21
MISO12: J113.2 U25.21
MISO13: J122.2 U27.21
MISO14: J131.2 U29.21
MISO15: J140.2 U31.21
MOSI: J3.1 U3.19
MOSI1: J14.1 U1.19
MOSI2: J23.1 U5.19
MOSI3: J32.1 U7.19
MOSI4: J41.1 U9.19
MOSI5: J50.1 U11.19
MOSI6: J59.1 U13.19
MOSI7: J68.1 U15.19
MOSI8: J77.1 U17.19
MOSI9: J86.1 U19.19
MOSI10: J95.1 U21.19
MOSI11: J104.1 U23.19
MOSI12: J113.1 U25.19
MOSI13: J122.1 U27.19
MOSI14: J131.1 U29.19
MOSI15: J140.1 U31.19
RX: J2.2 U3.10
RX1: J13.2 U1.10
RX2: J22.2 U5.10
RX3: J31.2 U7.10
RX4: J40.2 U9.10
RX5: J49.2 U11.10
RX6: J58.2 U13.10
RX7: J67.2 U15.10
RX8: J76.2 U17.10
RX9: J85.2 U19.10
RX10: J94.2 U21.10
RX11: J103.2 U23.10
RX12: J112.2 U25.10
RX13: J121.2 U27.10
RX14: J130.2 U29.10
RX15: J139.2 U31.10
SCK: J3.3 U3.23
SCK1: J14.3 U1.23
SCK2: J23.3 U5.23
SCK3: J32.3 U7.23
SCK4: J41.3 U9.23
SCK5: J50.3 U11.23
SCK6: J59.3 U13.23
SCK7: J68.3 U15.23
SCK8: J77.3 U17.23
SCK9: J86.3 U19.23
SCK10: J95.3 U21.23
SCK11: J104.3 U23.23
SCK12: J113.3 U25.23
SCK13: J122.3 U27.23
SCK14: J131.3 U29.23
SCK15: J140.3 U31.23
SCL: J1.4 J6.4 J7.4 J8.4 J12.2 U3.5
SCL1: J9.4 J11.2 J16.4 J17.4 J18.4 U1.5
SCL2: J19.4 J21.2 J25.4 J26.4 J27.4 U5.5
SCL3: J28.4 J30.2 J34.4 J35.4 J36.4 U7.5
SCL4: J37.4 J39.2 J43.4 J44.4 J45.4 U9.5
SCL5: J46.4 J48.2 J52.4 J53.4 J54.4 U11.5
SCL6: J55.4 J57.2 J61.4 J62.4 J63.4 U13.5
SCL7: J64.4 J66.2 J70.4 J71.4 J72.4 U15.5
SCL8: J73.4 J75.2 J79.4 J80.4 J81.4 U17.5
SCL9: J82.4 J84.2 J88.4 J89.4 J90.4 U19.5
SCL10: J91.4 J93.2 J97.4 J98.4 J99.4 U21.5
SCL11: J100.4 J102.2 J106.4 J107.4 J108.4 U23.5
SCL12: J109.4 J111.2 J115.4 J116.4 J117.4 U25.5
SCL13: J118.4 J120.2 J124.4 J125.4 J126.4 U27.5
SCL14: J127.4 J129.2 J133.4 J134.4 J135.4 U29.5
SCL15: J136.4 J138.2 J142.4 J143.4 J144.4 U31.5
SDA: J1.3 J6.3 J7.3 J8.3 J12.1 U3.3
SDA1: J9.3 J11.1 J16.3 J17.3 J18.3 U1.3
SDA2: J19.3 J21.1 J25.3 J26.3 J27.3 U5.3
SDA3: J28.3 J30.1 J34.3 J35.3 J36.3 U7.3
SDA4: J37.3 J39.1 J43.3 J44.3 J45.3 U9.3
SDA5: J46.3 J48.1 J52.3 J53.3 J54.3 U11.3
SDA6: J55.3 J57.1 J61.3 J62.3 J63.3 U13.3
SDA7: J64.3 J66.1 J70.3 J71.3 J72.3 U15.3
SDA8: J73.3 J75.1 J79.3 J80.3 J81.3 U17.3
SDA9: J82.3 J84.1 J88.3 J89.3 J90.3 U19.3
SDA10: J91.3 J93.1 J97.3 J98.3 J99.3 U21.3
SDA11: J100.3 J102.1 J106.3 J107.3 J108.3 U23.3
SDA12: J109.3 J111.1 J115.3 J116.3 J117.3 U25.3
SDA13: J118.3 J120.1 J124.3 J125.3 J126.3 U27.3
SDA14: J127.3 J129.1 J133.3 J134.3 J135.3 U29.3
SDA15: J136.3 J138.1 J142.3 J143.3 J144.3 U31.3
TX: J2.1 U3.8
TX1: J13.1 U1.8
TX2: J22.1 U5.8
TX3: J31.1 U7.8
TX4: J40.1 U9.8
TX5: J49.1 U11.8
TX6: J58.1 U13.8
TX7: J67.1 U15.8
TX8: J76.1 U17.8
TX9: J85.1 U19.8
TX10: J94.1 U21.8
TX11: J103.1 U23.8
TX12: J112.1 U25.8
TX13: J121.1 U27.8
TX14: J130.1 U29.8
TX15: J139.1 U31.8